# Altium PCB Power.PcbDoc (part 1 of 2)
Units mm, origin at the board's own origin, x right, y up, seen from the top; angles counter-clockwise.
Board outline 25.5 x 25.5 mm, 6 copper layers (1 Top (Sig/Pwr), 2 (GND), 3 (Sig/Pwr), 4 (GND/Sig), 5 (GND), 6 Bottom (Sig/Pwr)), stack 1.74 mm thick; 75 components, 42 nets, 252 pads, 4 vias.
Unrouted connection lines stored in the file: 215.
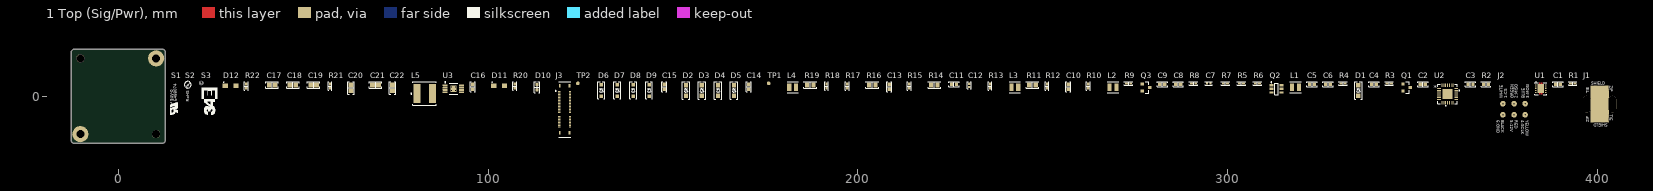
[diagram p0: 1 Top (Sig/Pwr) view]
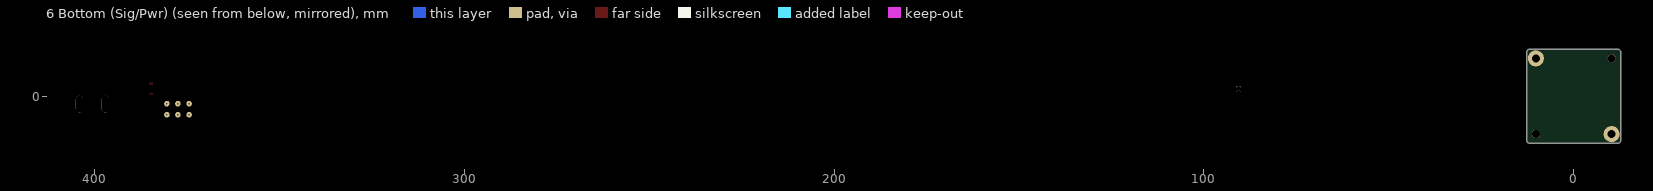
[diagram p1: 6 Bottom (Sig/Pwr) view, seen from below]
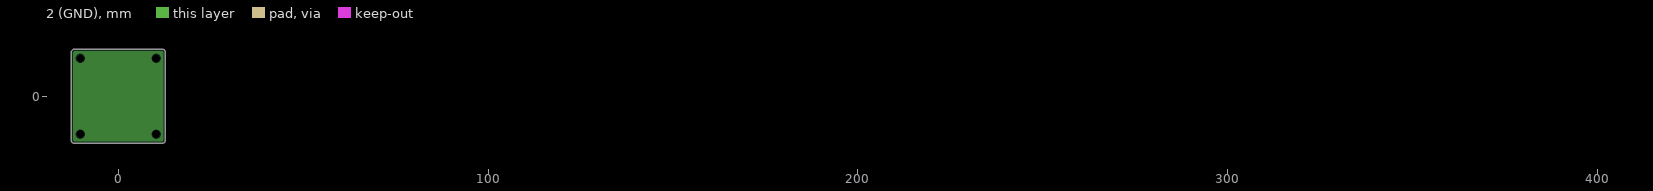
[diagram p2: 2 (GND), clearances drawn from the general rule]
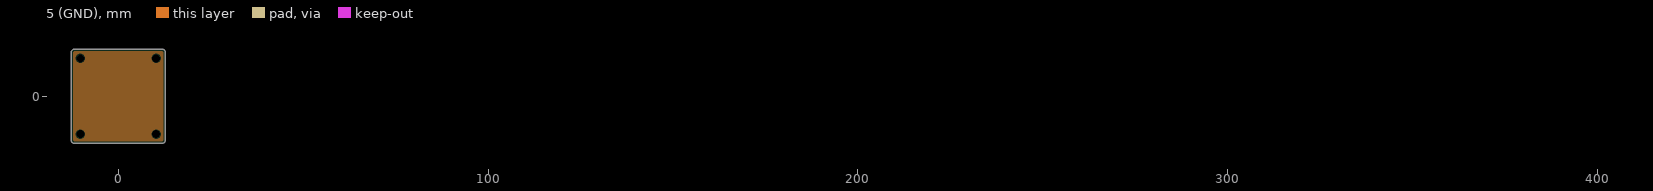
[diagram p3: 5 (GND), clearances drawn from the general rule]

## Layer stack, top to bottom
Top Solder: solder mask 0.0254, SM-001, Dk 4
1 Top (Sig/Pwr): signal copper 0.035
Dielectric 1: prepreg 0.11, PP-015, Dk 4.29
2 (GND): plane copper 0.035, net GND
Dielectric 2: core 0.6, Core-038, Dk 4.6
3 (Sig/Pwr): signal copper 0.035
Dielectric 3: prepreg 0.11, PP-015, Dk 4.29
4 (GND/Sig): signal copper 0.035
Dielectric 4: core 0.6, Core-038, Dk 4.6
5 (GND): plane copper 0.035, net GND
Dielectric 5: prepreg 0.11, PP-015, Dk 4.29
6 Bottom (Sig/Pwr): signal copper 0.035
Bottom Solder: solder mask 0.0254, SM-001, Dk 4

## Board outline
11.75,-12.75 11.973,-12.725 12.184,-12.651 12.373,-12.532 12.532,-12.373 12.651,-12.184 12.725,-11.973 12.75,-11.75 12.75,11.75 12.725,11.973 12.651,12.184 12.532,12.373 12.373,12.532 12.184,12.651 11.973,12.725 11.75,12.75 -11.75,12.75 -11.973,12.725 -12.184,12.651 -12.373,12.532 -12.532,12.373 -12.651,12.184 -12.725,11.973 -12.75,11.75 -12.75,-11.75 -12.725,-11.973 -12.651,-12.184 -12.532,-12.373 -12.373,-12.532 -12.184,-12.651 -11.973,-12.725 -11.75,-12.75

## Design rules (kind name [scope] priority, off if disabled: settings)
BoardOutlineClearance [IsPolygon] p1: gap=0.025 ignorepadtopadclearanceinfootprint=FALSE
Clearance [All] p1: gap=0.152 ignorepadtopadclearanceinfootprint=TRUE except(0.254: SMDPad-SMDPad)
DiffPairsRouting DiffPairsRouting_USB [InDifferentialPair('USB')] p1: maxlimit=0.254 minlimit=0.127 mostfreqgap=0.167 toplayer_mingap=0.254 toplayer_minwidth=0.176 toplayer_maxwidth=0.176 toplayer_prefwidth=0.152 bottomlayer_mingap=0.254 bottomlayer_minwidth=0.176 bottomlayer_maxwidth=0.176 bottomlayer_prefwidth=0.152 impedanceprofiledriven=TRUE impedanceprofileid={CBCFBFA0-D2E2-4D45-9055-C7C9E9EC4FAF} impedanceprofilevalue=90.000000 maxuncoupledlength=12.7
HoleSize [All] p1: absolutevalues=TRUE maxlimit=254 minlimit=0.3 maxpercent=80.000 minpercent=20.000
HoleToHoleClearance HoleToHoleClearance_Via [isVia] p1: gap=0.279 allowstackedmicrovias=TRUE
HoleToHoleClearance [Not isVia] p2: gap=0.406 allowstackedmicrovias=TRUE
MinimumSolderMaskSliver [All] p1: minsoldermaskwidth=0.102
PlaneClearance [All] p1: clearance=0.203
PlaneConnect [All] p1: planeconnectstyle=Direct reliefexpansion=0.508 reliefentries=4 reliefconductorwidth=0.254 reliefairgap=0.254
PolygonConnect PolygonConnect_ThruPin [IsThruPin] p1: thpad.connectstyle=Relief thpad.reliefconductorwidth=0.508 thpad.reliefentries=4 thpad.polygonreliefangle="45 Angle" thpad.airgapwidth=0.254 smdpad.connectstyle=Direct smdpad.reliefconductorwidth=0.254 smdpad.reliefentries=4 smdpad.polygonreliefangle="90 Angle" smdpad.airgapwidth=0.254 via.connectstyle=Relief via.reliefconductorwidth=0.254 via.reliefentries=4 via.polygonreliefangle="90 Angle" via.airgapwidth=0.254
PolygonConnect [All] p2: connectstyle=Direct reliefconductorwidth=0.254 reliefentries=4 polygonreliefangle="90 Angle" airgapwidth=0.254
RoutingVias [All] p1: holewidth=0.3 width=0.5 viastyle="Through Hole" minholewidth=0.3 minwidth=0.5 maxholewidth=0.3 maxwidth=0.5
SilkToSilkClearance [All] p1: silktosilkclearance=0
SilkToSolderMaskClearance [IsPad] p1: minsilkscreentomaskgap=0.152 clearancetoexposedcopper=TRUE
SolderMaskExpansion SolderMaskExpansion_Via [IsVia] p1: expansion=0.102 istentingtop=TRUE
SolderMaskExpansion [Not IsVia] p2: expansion=0.051 istentingtop=FALSE
Width [All] p1: maxlimit=2.032 minlimit=0.152 preferedwidth=0.254 minimp=50.000000 maximp=50.000000 favimp=50.000000
22 further rules are at their usual default settings.

## Components (designator, comment, footprint, x,y, rotation, side; value= is the part's Value field where it differs from the comment)
C1 "1 µF" "CAP 0603_1608" 389.357,3.277 r0 top
C2 "2.2µF" "CAP 0603_1608" 352.831,3.277 r0 top
C3 "22µF" "CAP 0603_1608" 365.709,3.277 r0 top
C4 "1 µF" "CAP 0603_1608" 339.623,3.277 r0 top
C5 "22µF" "CAP 0603_1608" 322.859,3.277 r0 top
C6 "22µF" "CAP 0603_1608" 327.177,3.277 r0 top
C7 "120pF" "CAP 0402_1005" 294.919,3.48 r0 top
C8 "2.2µF" "CAP 0603_1608" 286.69,3.277 r0 top
C9 "22µF" "CAP 0603_1608" 282.372,3.277 r0 top
C10 "2.2µF" "CAP 0603_1608" 256.921,2.565 r90 top
C11 "22µF" "CAP 0603_1608" 226.009,3.277 r0 top
C12 "15 pF" "CAP 0402_1005" 230.175,2.972 r90 top
C13 "2.2µF" "CAP 0603_1608" 208.509,2.565 r90 top
C14 "22µF" "CAP 0603_1608" 170.536,2.565 r90 top
C15 "2.2µF" "CAP 0603_1608" 147.625,2.565 r90 top
C16 "0.1µF" "CAP 0603_1608" 95.885,2.565 r90 top
C17 "10µF" "CAP 0805_2012" 41.631,3.073 r0 top
C18 "10µF" "CAP 0805_2012" 47.219,3.073 r0 top
C19 "10µF" "CAP 0805_2012" 52.832,3.073 r0 top
C20 "22 µF" "CAP 0805_2012" 62.967,2.286 r90 top
C21 "22 µF" "CAP 0805_2012" 69.596,3.073 r0 top
C22 "22 µF" "CAP 0805_2012" 74.143,2.286 r90 top
D1 "ATV02W360B-HF" SOD123F 335.407,1.575 r90 top
D2 "ATV02W360B-HF" SOD123F 153.543,1.575 r90 top
D3 "ATV02W360B-HF" SOD123F 157.861,1.575 r90 top
D4 "ATV02W360B-HF" SOD123F 162.204,1.575 r90 top
D5 "ATV02W360B-HF" SOD123F 166.522,1.575 r90 top
D6 "MMSZ5226BT1G" SOD-123 130.607,1.575 r90 top
D7 "MMSZ5226BT1G" SOD-123 134.925,1.575 r90 top
D8 "MMSZ5226BT1G" SOD-123 139.243,1.575 r90 top
D9 "MMSZ5226BT1G" SOD-123 143.561,1.575 r90 top
D10 "Red" "LED 0603_1608 RED" 113.233,2.464 r90 top
D11 "SS26FL" SS26FL 103.022,2.87 r0 top
D12 "SS26FL" SS26FL 30.404,2.87 r0 top
J1 "30-00672-SHLD" 30-00672-SHLD 400.634,-2.108 r90 top
J2 "30-00672-THT" 30-00672-THT 377.495,-3.505 r0 top
J3 "2049280501" 2049280501 120.726,-3.531 r0 top
L1 "1.5uH" FP-DFE252012C-IPC_C 318.389,2.464 r0 top
L2 "1.5uH" FP-DFE252012C-IPC_C 269.037,2.464 r0 top
L3 "1.5uH" FP-DFE252012C-IPC_C 242.494,2.464 r0 top
L4 "1.5uH" FP-DFE252012C-IPC_C 182.397,2.464 r0 top
L5 "10uH" FP-VLS6045EX-100M-MFG 82.855,0.711 r0 top
Q1 "ZXM61N03FTA" FP-SOT23-MFG 348.437,2.362 r0 top
Q2 "DMP3056LDM-7" SOT95P285X130-6N 313.258,2.007 r0 top
Q3 "ZXM61N03FTA" FP-SOT23-MFG 277.978,2.362 r0 top
R1 "0" "RES 0402_1005" 393.37,3.454 r0 top value="0 Ohms"
R2 "47k" "RES 0603_1608" 369.926,3.277 r0 top value="47 kOhms"
R3 "9.31k 1%" "RES 0402_1005" 343.738,3.454 r0 top value="9.31 kOhms"
R4 "10k" "RES 0402_1005" 331.292,3.454 r0 top value="10 kOhms"
R5 "100k 1%" "RES 0402_1005" 303.759,3.454 r0 top value="100 kOhms"
R6 "0" "RES 0402_1005" 308.077,3.454 r0 top value="0 Ohms"
R7 "120k 1%" "RES 0402_1005" 299.441,3.454 r0 top value="120 kOhms"
R8 "10k" "RES 0402_1005" 290.805,3.454 r0 top value="10 kOhms"
R9 "10k" "RES 0402_1005" 273.279,3.454 r0 top value="10 kOhms"
R10 "0" "RES 0402_1005" 262.331,2.769 r90 top value="0 Ohms"
R11 "100" "RES 0805_2012" 247.244,3.073 r0 top value="100 Ohms"
R12 "10k" "RES 0402_1005" 251.155,2.769 r90 top value="10 kOhms"
R13 "88.7k 1%" "RES 0402_1005" 235.788,2.769 r90 top value="88.7 kOhms"
R14 "100" "RES 0805_2012" 220.701,3.073 r0 top value="100 Ohms"
R15 "0" "RES 0402_1005" 213.919,2.769 r90 top value="0 Ohms"
R16 "100" "RES 0805_2012" 203.911,3.073 r0 top value="100 Ohms"
R17 "59k 1%" "RES 0402_1005" 197.155,2.769 r90 top value="59 kOhms"
R18 "10k" "RES 0402_1005" 191.567,2.769 r90 top value="10 kOhms"
R19 "100" "RES 0805_2012" 187.147,3.073 r0 top value="100 Ohms"
R20 "1k" "RES 0402_1005" 107.213,2.769 r90 top
R21 "5.1k 1%" "RES 0402_1005" 57.252,2.769 r90 top value="5.1 kOhms"
R22 "953 1%" "RES 0402_1005" 34.62,2.769 r90 top value="953 Ohms"
S1 "" UL 14.986,-1.448 r90 top
S2 "" RoHS 18.796,1.168 r90 top
S3 "" 34EngineeringLogo 27.153,-5.359 r90 top
TP1 "" TestPoint1mm 175.895,3.505 r90 top
TP2 "" TestPoint1mm 124.282,3.505 r90 top
U1 "TCKE812NL,RF" WSON10B_TOS 384.708,2.057 r0 top
U2 "MAX20029ATIF/V+" MAX20029ATIF/V+ 359.512,0.61 r0 top
U3 "LM2738XMY/NOPB" DGN0008A_N 90.653,2.032 r0 top

## Footprints (in the part's own frame and the unit in brackets; to place one, negate y for a bottom-side part, rotate by r counter-clockwise, add the part's x,y. Pads: shape width x height; smd on the part's side, far side on the other; paste and mask are expansions set on the pad)
30-00672-SHLD [mm]
  oval 4.5x2 hole 2 slot 4.5 at 0 deg unplated: MNT(0,3.5) MNT(0,-3.5)
  rect 10x5 smd: MNT(0,0)
30-00672-THT [mm]
  round 1.5 hole 0.35: 1(-3,1.5) 2(0,1.5) 3(3,1.5) 4(3,-1.5) 5(0,-1.5) 6(-3,-1.5)
34EngineeringLogo [mm]
  silkscreen extent 0.33,0.32 7.61,4.55
2049280501 [mm]
  rect 0.63x0.25 smd paste+0 mask+0: 1(-1.435,4.8) 2(-1.435,4.4) 3(-1.435,4) 4(-1.435,3.6) 5(-1.435,3.2) 6(-1.435,2.8) 7(-1.435,2.4) 8(-1.435,2) 9(-1.435,1.6) 10(-1.435,1.2) 11(-1.435,0.8) 12(-1.435,0.4) 13(-1.435,0) 14(-1.435,-0.4) 15(-1.435,-0.8) 16(-1.435,-1.2) 17(-1.435,-1.6) 18(-1.435,-2) 19(-1.435,-2.4) 20(-1.435,-2.8) 21(-1.435,-3.2) 22(-1.435,-3.6) 23(-1.435,-4) 24(-1.435,-4.4) 25(-1.435,-4.8) 26(1.435,-4.8) 27(1.435,-4.4) 28(1.435,-4) 29(1.435,-3.6) 30(1.435,-3.2) 31(1.435,-2.8) 32(1.435,-2.4) 33(1.435,-2) 34(1.435,-1.6) 35(1.435,-1.2) 36(1.435,-0.8) 37(1.435,-0.4) 38(1.435,0) 39(1.435,0.4) 40(1.435,0.8) 41(1.435,1.2) 42(1.435,1.6) 43(1.435,2) 44(1.435,2.4) 45(1.435,2.8) 46(1.435,3.2) 47(1.435,3.6) 48(1.435,4) 49(1.435,4.4) 50(1.435,4.8)
  rect 0.5x1 smd paste+0 mask+0: MNT(-1.34,-6.36) MNT(-1.34,6.36) MNT(1.34,-6.36) MNT(1.34,6.36)
  silkscreen extent -2.55,-7.5 1.6,7.5, body extent -1.6,-7.5 1.6,7.5, height 2.37
"CAP 0402_1005" [mm] "Chip Capacitor, 2-Leads, Body 1.02x0.51mm, IPC Medium Density"
  rect 0.6x0.64 smd: 1(-0.44,0) 2(0.44,0)
  silkscreen extent -1,-0.5 1,0.5, body extent -0.5,-0.26 0.5,0.26, height 0.52
"CAP 0603_1608" [mm] "Chip Capacitor, 2-Leads, Body 1.60x0.80mm, IPC Medium Density"
  rect 0.9x1 smd: 1(-0.675,0) 2(0.675,0)
  silkscreen extent -1.4,-0.7 1.4,0.7, body extent -0.8,-0.41 0.8,0.41, height 0.82
"CAP 0805_2012" [mm] "Chip Capacitor, 2-Leads, Body 2.00x1.20mm, IPC Medium Density"
  rect 1.3x1.4 smd: 1(-0.8,0) 2(0.8,0)
  silkscreen extent -1.7,-0.9 1.7,0.9, body extent -1,-0.64 1,0.64, height 1.26
DGN0008A_N [mm] "TSOP, 8-Leads, Body 3.1x3.1mm, Pitch 0.65mm, Thermal Pad 1.85x1.73mm, IPC Medium Density"
  rrect22% 1.35x0.45 smd: 1(-2.225,0.975) 2(-2.225,0.325) 3(-2.225,-0.325) 4(-2.225,-0.975) 5(2.225,-0.975) 6(2.225,-0.325) 7(2.225,0.325) 8(2.225,0.975)
  rrect6% 1.73x1.85 smd: 9(0,0)
  silkscreen extent -2.35,-1.55 1.15,1.9, body extent -2.45,-1.5 2.45,1.5, height 0.94
FP-DFE252012C-IPC_C [mm]
  rect 1.155x2.106 smd paste+0 mask+0: 1(-0.926,0) 2(0.926,0)
  silkscreen extent -1.5,-1.5 1.5,1.5, body extent -1.6,-1.2 1.6,1.2, height 0.25
FP-SOT23-MFG [mm]
  rect 0.9x0.8 smd paste+0 mask+0: 1(-1,0.95) 2(-1,-0.95) 3(1,0)
  silkscreen extent -0.18,-1.5 0.7,1.5, body extent -1.55,-1.6 1.55,1.6, height 0.25
FP-VLS6045EX-100M-MFG [mm]
  rect 1.9x5.1 smd paste+0 mask+0: 1(-2.1,0) 2(2.1,0)
  silkscreen extent -3.72,-3.15 3.15,3.15, body extent -3.25,-3.25 3.25,3.25, height 0.25
"LED 0603_1608 RED" [mm] "Chip Diode, 2-Leads, Body 1.60x0.80mm, IPC Medium Density"
  rect 0.8x0.8 smd: 1(-0.75,0) 2(0.75,0)
  silkscreen extent -1.52,-0.7 1.52,0.7, body extent -0.8,-0.4 0.8,0.4, height 0.53
MAX20029ATIF/V+ [mil]
  rect 38x10 smd paste+0 mask+0: 1(-91.5,59.06) 2(-91.5,39.37) 3(-91.5,19.68) 4(-91.5,0) 5(-91.5,-19.68) 6(-91.5,-39.37) 7(-91.5,-59.06) 15(91.5,-59.06) 16(91.5,-39.37) 17(91.5,-19.68) 18(91.5,0) 19(91.5,19.68) 20(91.5,39.37) 21(91.5,59.06)
  rect 10x38 smd paste+0 mask+0: 8(-59.06,-91.5) 9(-39.37,-91.5) 10(-19.69,-91.5) 11(0,-91.5) 12(19.69,-91.5) 13(39.37,-91.5) 14(59.06,-91.5) 22(59.06,91.5) 23(39.37,91.5) 24(19.69,91.5) 25(0,91.5) 26(-19.69,91.5) 27(-39.37,91.5) 28(-59.06,91.5)
  rect 110x110 smd paste-54.5 mask+0: 29(0,0)
  silkscreen extent -104,-130 130,104, body extent -99,-99 99,99, height 32
"RES 0402_1005" [mm] "Chip Resistor, 2-Leads, Body 1.0x0.5mm, IPC Medium Density"
  rect 0.75x0.6 smd: 1(-0.575,0) 2(0.575,0)
  silkscreen extent -1.14,-0.51 1.14,0.51, body extent -0.5,-0.25 0.5,0.25, height 0.35
"RES 0603_1608" [mm] "Chip Resistor, 2-Leads, Body 1.60x0.80mm, IPC Medium Density"
  rect 0.85x0.95 smd: 1(-0.65,0) 2(0.65,0)
  silkscreen extent -1.27,-0.7 1.27,0.7, body extent -0.8,-0.4 0.8,0.4, height 0.45
"RES 0805_2012" [mm] "Chip Resistor, 2-Leads, Body 2.00x1.25mm, IPC Medium Density"
  rect 1.15x1.35 smd: 1(-0.875,0) 2(0.875,0)
  silkscreen extent -1.7,-0.9 1.7,0.9, body extent -1,-0.62 1,0.63, height 0.6
RoHS [mm]
  silkscreen extent 1.05,-0.9 2.85,0.9
SOD123F [mm] "SODFL, 2-Leads, Body 1.60x3.50mm, IPC Medium Density"
  rect 1.2x1.2 smd: 1(-1.43,0) 2(1.43,0)
  silkscreen extent -2.41,-1.02 2.41,1.02, body extent -1.75,-0.8 1.75,0.8, height 1.1
SOD-123 [mm] "SOD, 2-Leads, Body 1.55x3.70mm, IPC Medium Density"
  rect 0.9x0.95 smd: 1(-1.575,0) 2(1.575,0)
  silkscreen extent -2.3,-0.92 2.41,0.92, body extent -1.86,-0.78 1.86,0.77, height 1.35
SOT95P285X130-6N [mm] "SOT23, 6-Leads, Body 3.00x2.85mm, Pitch 0.95mm, IPC Medium Density"
  rect 1.05x0.6 smd: 1(-1.375,0.95) 2(-1.375,0) 3(-1.375,-0.95) 4(1.375,-0.95) 5(1.375,0) 6(1.375,0.95)
  silkscreen extent -1.5,-1.55 0.45,1.92, body extent -1.5,-1.55 1.5,1.55, height 1.3
SS26FL [mm] "SODFL, 2-Leads, Body 1.73x3.60mm, IPC Medium Density"
  rect 1.4x1.15 smd: 1(-1.45,0) 2(1.45,0)
  silkscreen extent -1.96,0.88 -1.85,1, body extent -1.8,-0.97 1.8,0.97, height 1.08
TestPoint1mm [mm]
  round 1 smd: 1(0,0)
UL [mm]
  silkscreen extent -3.57,-1.1 -0.22,0.93
WSON10B_TOS [mm]
  rect 0.4x0.279 smd paste+0 mask+0: 1(-1.3,1) 2(-1.3,0.5) 3(-1.3,0) 4(-1.3,-0.5) 5(-1.3,-1) 6(1.3,-1) 7(1.3,-0.5) 8(1.3,0) 9(1.3,0.5) 10(1.3,1)
  rect 1.65x2.4 smd paste+0 mask+0: 11(0,0)
  1 Top (Sig/Pwr) region: -0.14,1.194 -0.368,1.194 -0.368,1.537 -0.14,1.537
  1 Top (Sig/Pwr) region: 0.14,1.194 0.368,1.194 0.368,1.537 0.14,1.537
  1 Top (Sig/Pwr) region: -0.14,-1.194 -0.368,-1.194 -0.368,-1.537 -0.14,-1.537
  1 Top (Sig/Pwr) region: 0.14,-1.194 0.368,-1.194 0.368,-1.537 0.14,-1.537
  silkscreen extent -1.63,-1.63 1.63,1.85, body extent -1.5,-1.54 1.5,1.54, height 0.71

## Part data
C1 C4: library part TMK107BJ105MAHT, "CAP CER 1UF 25V X5R 0603", Device Package="0603 (1608 Metric)", Manufacturer="Taiyo Yuden", Operating Temperature="-55°C ~ 85°C", Ratings=AEC-Q200, Supplier Part Number 1=587-6356-1-ND, Temperature Coefficient=X5R, Tolerance=±20%, Voltage - Rated=25V, Applications="Automotive, SMPS Filtering", Capacitance="1 µF", ComponentLink1Description=Datasheet, ComponentLink1URL="https://ds.yuden.co.jp/TYCOMPAS/ut/detail?pn=TMK107BJ105MAHT &u=M", ComponentLink2Description="DigiKey Link", ComponentLink2URL=https://www.digikey.com/en/products/detail/taiyo-yuden/TMK107BJ105MAHT/6563148, Features="Ultra Low ESR", lastupdated="7/10/2022 9:03:06 AM", Lifecycle Status=Active, Minimum Order=1, Mounting Type="Surface Mount, MLCC", Package / Case="0603 (1608 Metric)", Packaging=TapeAndReel, Part Number=TMK107BJ105MAHT, Part Status=Active, partid=2797, price=0.02, Series=M, Size / Dimension="0.063\" L x 0.031\" W (1.60mm x 0.80mm)", Supplier 1=DigiKey, Thickness (Max)="0.035\" (0.90mm)"
C2 C8 C10 C13 C15: library part 0603ZD225MAT2A, "CAP CER 2.2UF 10V X5R 0603", Device Package="0603 (1608 Metric)", Manufacturer="AVX Corporation", Operating Temperature="-55°C ~ 85°C", Supplier Part Number 1=478-7941-1-ND, Temperature Coefficient=X5R, Tolerance=±20%, Voltage - Rated=10V, Applications="General Purpose", Capacitance=2.2µF, ComponentLink1Description=Datasheet, ComponentLink1URL=http://datasheets.avx.com/cx5r.pdf, ComponentLink2Description="DigiKey Link", ComponentLink2URL=http://digikey.com/product-detail/en/avx-corporation/0603ZD225MAT2A/478-7941-1-ND/3881564, lastupdated="9/2/2020 1:03:07 AM", Lifecycle Status=Active, Minimum Order=1, Mounting Type="Surface Mount, MLCC", Package / Case="0603 (1608 Metric)", Packaging=TapeAndReel, Part Number=0603ZD225MAT2A, Part Status=Active, partid=16270, price=0.04, Series=-, Size / Dimension="0.063\" L x 0.032\" W (1.60mm x 0.81mm)", Supplier 1=DigiKey, Thickness (Max)="0.035\" (0.90mm)"
C3 C5 C6 C9 C11 C14: library part 06036D226MAT2A, "CAP CER 22UF 6.3V X5R 0603", Device Package="0603 (1608 Metric)", Manufacturer="AVX Corporation", Operating Temperature="-55°C ~ 85°C", Supplier Part Number 1=478-10812-1-ND, Temperature Coefficient=X5R, Tolerance=±20%, Voltage - Rated=6.3V, Applications="General Purpose", Capacitance=22µF, ComponentLink1Description=Datasheet, ComponentLink1URL=http://datasheets.avx.com/cx5r.pdf, ComponentLink2Description="DigiKey Link", ComponentLink2URL=http://digikey.com/product-detail/en/avx-corporation/06036D226MAT2A/478-10812-1-ND/7536349, lastupdated="9/2/2020 1:03:16 AM", Lifecycle Status=Active, Minimum Order=1, Mounting Type="Surface Mount, MLCC", Package / Case="0603 (1608 Metric)", Packaging=TapeAndReel, Part Number=06036D226MAT2A, Part Status=Active, partid=13180, price=0.10, Series=-, Size / Dimension="0.063\" L x 0.032\" W (1.60mm x 0.81mm)", Supplier 1=DigiKey, Thickness (Max)="0.040\" (1.02mm)"
C7: library part 04023A121JAT2A, "CAP CER 120PF 25V NP0 0402", Device Package="0402 (1005 Metric)", Manufacturer="AVX Corporation", Operating Temperature="-55°C ~ 125°C", Supplier Part Number 1=478-11356-1-ND, Temperature Coefficient="C0G, NP0", Tolerance=±5%, Voltage - Rated=25V, Applications="General Purpose", Capacitance=120pF, ComponentLink1Description=Datasheet, ComponentLink1URL=http://datasheets.avx.com/C0GNP0-Dielectric.pdf, ComponentLink2Description="DigiKey Link", ComponentLink2URL=http://digikey.com/product-detail/en/avx-corporation/04023A121JAT2A/478-11356-1-ND/8019109, lastupdated="2/8/2022 12:26:51 PM", Lifecycle Status=Active, Minimum Order=1, Mounting Type="Surface Mount, MLCC", Package / Case="0402 (1005 Metric)", Packaging=TapeAndReel, Part Number=04023A121JAT2A, Part Status=Active, partid=6216, price=0.01, Series=-, Size / Dimension="0.039\" L x 0.020\" W (1.00mm x 0.50mm)", Supplier 1=DigiKey, Thickness (Max)="0.022\" (0.56mm)"
C12: library part 885012005008, "CAP CER 15PF 10V C0G/NP0 0402", Device Package="0402 (1005 Metric)", Manufacturer="Würth Elektronik", Operating Temperature="-55°C ~ 125°C", Supplier Part Number 1=732-7426-1-ND, Temperature Coefficient="C0G, NP0", Tolerance=±5%, Voltage - Rated=10V, Applications="General Purpose", Capacitance="15 pF", ComponentLink1Description=Datasheet, ComponentLink1URL=https://katalog.we-online.de/pbs/datasheet/885012005008.pdf, ComponentLink2Description="DigiKey Link", ComponentLink2URL=https://www.digikey.com/en/products/detail/würth-elektronik/885012005008/5453281, lastupdated="7/10/2022 8:59:25 AM", Lifecycle Status=Active, Minimum Order=1, Mounting Type="Surface Mount, MLCC", Package / Case="0402 (1005 Metric)", Packaging=TapeAndReel, Part Number=885012005008, Part Status=Active, partid=7101, price=0.01, Series=WCAP-CSGP, Size / Dimension="0.039\" L x 0.020\" W (1.00mm x 0.50mm)", Supplier 1=DigiKey, Thickness (Max)="0.022\" (0.55mm)"
C16: library part 06033C104K4T4A, "CAP CER 0.1UF 25V X7R 0603", Device Package="0603 (1608 Metric)", Manufacturer="AVX Corporation", Operating Temperature="-55°C ~ 125°C", Ratings=AEC-Q200, Supplier Part Number 1=478-10673-1-ND, Temperature Coefficient=X7R, Tolerance=±10%, Voltage - Rated=25V, Applications=Automotive, Capacitance=0.1µF, ComponentLink1Description=Datasheet, ComponentLink1URL=http://datasheets.avx.com/AutoMLCC.pdf, ComponentLink2Description="DigiKey Link", ComponentLink2URL=http://digikey.com/product-detail/en/avx-corporation/06033C104K4T4A/478-10673-1-ND/7536544, lastupdated="9/2/2020 1:03:35 AM", Lifecycle Status=Active, Minimum Order=1, Mounting Type="Surface Mount, MLCC", Package / Case="0603 (1608 Metric)", Packaging=TapeAndReel, Part Number=06033C104K4T4A, Part Status=Active, partid=2749, price=0.02, Series=-, Size / Dimension="0.063\" L x 0.032\" W (1.60mm x 0.81mm)", Supplier 1=DigiKey, Thickness (Max)="0.035\" (0.90mm)"
C17 C18 C19: library part 08053D106KAT2A, "CAP CER 10UF 25V X5R 0805", Device Package="0805 (2012 Metric)", Manufacturer="AVX Corporation", Operating Temperature="-55°C ~ 85°C", Supplier Part Number 1=478-7436-1-ND, Temperature Coefficient=X5R, Tolerance=±10%, Voltage - Rated=25V, Applications="General Purpose", Capacitance=10µF, ComponentLink1Description=Datasheet, ComponentLink1URL=http://datasheets.avx.com/cx5r.pdf, ComponentLink2Description="DigiKey Link", ComponentLink2URL=http://digikey.com/product-detail/en/avx-corporation/08053D106KAT2A/478-7436-1-ND/3660337, lastupdated="9/2/2020 1:04:14 AM", Lifecycle Status=Active, Minimum Order=1, Mounting Type="Surface Mount, MLCC", Package / Case="0805 (2012 Metric)", Packaging=TapeAndReel, Part Number=08053D106KAT2A, Part Status=Active, partid=15850, price=0.13, Series=-, Size / Dimension="0.079\" L x 0.049\" W (2.00mm x 1.25mm)", Supplier 1=DigiKey, Thickness (Max)="0.051\" (1.30mm)"
C20 C21 C22: library part TMK212BBJ226MG-TT, "CAP CER 22UF 25V X5R 0805", Device Package="0805 (2012 Metric)", Manufacturer="Taiyo Yuden", Operating Temperature="-55°C ~ 85°C", Supplier Part Number 1=587-6359-1-ND, Temperature Coefficient=X5R, Tolerance=±20%, Voltage - Rated=25V, Applications="SMPS Filtering", Capacitance="22 µF", ComponentLink1Description=Datasheet, ComponentLink1URL="https://ds.yuden.co.jp/TYCOMPAS/ut/detail?pn=TMK212BBJ226MG-TT &u=M", ComponentLink2Description="DigiKey Link", ComponentLink2URL=https://www.digikey.com/en/products/detail/taiyo-yuden/TMK212BBJ226MG-TT/7403956, lastupdated="7/10/2022 9:05:54 AM", Lifecycle Status=Active, Minimum Order=1, Mounting Type="Surface Mount, MLCC", Package / Case="0805 (2012 Metric)", Packaging=TapeAndReel, Part Number=TMK212BBJ226MG-TT, Part Status=Active, partid=8285, price=0.21, Series=M, Size / Dimension="0.079\" L x 0.049\" W (2.00mm x 1.25mm)", Supplier 1=DigiKey, Thickness (Max)="0.057\" (1.45mm)"
D1 D2 D3 D4 D5: "TVS DIODE 36VWM 58.1VC SOD123", Current - Peak Pulse (10/1000µs)=3.44A, Manufacturer="Comchip Technology", Operating Temperature="-55°C ~ 150°C (TJ)", Package / Case=SOD-123F, Power - Peak Pulse=200W, Power Line Protection=No, Supplier Part Number 1=641-1664-1-ND, Voltage - Breakdown (Min)=40V, Voltage - Clamping (Max) @ Ipp=58.1V, Voltage - Reverse Standoff (Typ)=36V, Applications=Automotive, Bidirectional Channels=1, ComponentLink1Description=Datasheet, ComponentLink1URL=http://www.comchiptech.com/admin/files/product/ATV02W-HF%20series%20RevC.pdf, ComponentLink2Description="DigiKey Link", ComponentLink2URL=https://www.digikey.com/en/products/detail/comchip-technology/ATV02W360B-HF/5013738, lastupdated="7/10/2022 10:02:24 AM", Lifecycle Status=Active, Minimum Order=1, Mounting Type="Surface Mount", Packaging=TapeAndReel, Part Number=ATV02W360B-HF, Part Status=Active, partid=10262, price=0.09, Series="Automotive, AEC-Q101", Supplier 1=DigiKey, Supplier Device Package=SOD-123F, Type=Zener
D6 D7 D8 D9: "DIODE ZENER 3.3V 500MW SOD123", Current - Reverse Leakage @ Vr="25µA @ 1V", Manufacturer="ON Semiconductor", Operating Temperature="-55°C ~ 150°C", Package / Case=SOD-123, Power - Max=500mW, Supplier Part Number 1=MMSZ5226BT1GOSCT-ND, Tolerance=±5%, Voltage - Forward (Vf) (Max) @ If="900mV @ 10mA", Voltage - Zener (Nom) (Vz)=3.3V, ComponentLink1Description=Datasheet, ComponentLink1URL=http://www.onsemi.com/pub/Collateral/MMSZ5221BT1-D.PDF, ComponentLink2Description="DigiKey Link", ComponentLink2URL=http://digikey.com/product-detail/en/on-semiconductor/MMSZ5226BT1G/MMSZ5226BT1GOSCT-ND/1139888, Impedance (Max) (Zzt)="28 Ohms", lastupdated="7/10/2022 9:46:18 AM", Lifecycle Status=Active, Minimum Order=1, Mounting Type="Surface Mount", Packaging=TapeAndReel, Part Number=MMSZ5226BT1G, Part Status=Active, partid=1977, price=0.04, Series=-, Supplier 1=DigiKey, Supplier Device Package=SOD-123
D10: library part SML-D12U1WT86, "LED RED DIFFUSED 1608 SMD", Current - Test=20mA, Device Package="0603 (1608 Metric)", Lens Color=White, Manufacturer="Rohm Semiconductor", Millicandela Rating=63mcd, Supplier Device Package="1608 (0603)", Supplier Part Number 1=SML-D12U1WT86CT-ND, Voltage - Forward (Vf) (Typ)=2.2V, Color=Red, ComponentLink1Description=Datasheet, ComponentLink1URL=https://www.rohm.com/datasheet/SML-D12U1W, ComponentLink2Description="DigiKey Link", ComponentLink2URL=https://www.digikey.com/en/products/detail/rohm-semiconductor/SML-D12U1WT86/5843853, Configuration=Standard, Height (Max)=0.65mm, lastupdated="7/10/2022 9:48:39 AM", Lens Size="1.20mm x 0.80mm", Lens Style="Rectangle with Flat Top", Lens Transparency=Diffused, Lifecycle Status=Active, Minimum Order=1, Mounting Type="Surface Mount", Package / Case="0603 (1608 Metric)", Packaging=TapeAndReel, Part Number=SML-D12U1WT86, Part Status=Active, partid=452, price=0.02, Series=SML-D12, Size / Dimension="1.60mm L x 0.80mm W", Supplier 1=DigiKey, Wavelength - Dominant=620nm
D11 D12: "Diode Schottky Barrier Rectifier 60V 2A 2-Pin SOD-123F T/R", Average Rectified Current=2A, Case/Package=SOD, Manufacturer="ON Semiconductor / Fairchild", Max Forward Surge Current (Ifsm)=50A, Max Repetitive Reverse Voltage (Vrrm)=60V, Category="Rectifier Diodes", ComponentLink1Description=http://www.farnell.com/datasheets/2552652.pdf?src-supplier=Farnell, ComponentLink1URL=http://www.farnell.com/datasheets/2552652.pdf?src-supplier=Farnell, ComponentLink2Description=https://www.fairchildsemi.com/datasheets/SS/SS24FL.pdf?src-supplier=Digi-Key, ComponentLink2URL=https://www.fairchildsemi.com/datasheets/SS/SS24FL.pdf?src-supplier=Digi-Key, ComponentLink3Description=http://www.farnell.com/datasheets/2552652.pdf?src-supplier=Element14, ComponentLink3URL=http://www.farnell.com/datasheets/2552652.pdf?src-supplier=Element14, ComponentLink4Description=http://www.farnell.com/datasheets/2552652.pdf?src-supplier=Newark, ComponentLink4URL=http://www.farnell.com/datasheets/2552652.pdf?src-supplier=Newark, Element Configuration=Single, Manufacturer Part Number=SS26FL, Max Reverse Voltage (DC)=60V, Mount="Surface Mount", Packaging="Tape and Reel", Pricing 1="3000=0.09160, 6000=0.09070, 9000=0.07910, 12000=0.07830, 15000=0.07750, 24000=0.07030 (USD)", Reverse Recovery Time=8.26ns, RoHS=Yes, RoHS Compliant=Yes, Stock 1=288000, Supplier 1="Arrow Electronics", Supplier Part Number 1=SS26FL, Weight=0.0276g
J1 J2: "Multi-Conductor Cable Braid Thermoplastic Elastomer 6Conductors 28AWG 4.9mm 300V Black", Color=Black, Manufacturer=Tensility, Manufacturer Part Number=30-00672, Max Operating Temperature=80°C, Min Operating Temperature=-40°C, Supplier Part Number 1=T1388-5-ND, Voltage=300V, ComponentLink1Description=http://www.tensility.com/pdffiles/30-00672.pdf?src-supplier=Digi-Key, ComponentLink1URL=http://www.tensility.com/pdffiles/30-00672.pdf?src-supplier=Digi-Key, Conductor Material=Copper, Insulation Material=Polyurethane, Number of Conductors=6, Pricing 1="1=23.49000, 5=19.22200, 10=14.95100 (USD)", RoHS=No, Stock 1=6, Supplier 1=Digi-Key, Wire/Cable Gauge=28AWG, Wire/Cable Type=Multi-Conductor
J3: "SlimStack Board-to-Board Plug, 0.40mm Pitch, FSB3 Floating Series, 3.00mm Mated Height, 3.20 Mated Width, 50 Circuits", Manufacturer=Molex, Manufacturer Part Number=203955-0503, Supplier Part Number 1=538-204928-0501, Pricing 1="1=4.46000, 10=3.93000, 50=3.93000, 100=3.13000, 500=3.04000, 1000=2.59000, 3000=2.41000, 6000=2.32000, 9000=2.23000, 10000=2.41000 (USD)", RoHS=No, Stock 1=8554, Supplier 1=Mouser
L1 L2 L3 L4: library part CMP-06042-006881-1, "Shielded Wirewound Inductor 1.5uH 20% 2600mA 0.06Ω 1008 (2520)", Case Code (Imperial)=1008, Case Code (Metric)=2520, Current Rating=3.5A, DC Resistance (DCR)=60mR, Max DC Current=2.6A, Max Operating Temperature=125°C, Min Operating Temperature=-40°C, Resistor Type=Wirewound, Test Frequency=1MHz, Tolerance=20%, Case/Package=1008, Core Material=Ferrite, Depth=2mm, Height - Seated (Max)=0.039inch, Inductance=1.5uH, Length=0.098inch, Mount="Surface Mount", Packaging="Tape and Reel", Shielding=Shielded, Width=0.079inch
L5: library part CMP-08253-000184-1, "FIXED IND 10UH 3.4A 61 MOHM SMD", Case/Package=Nonstandard, Current Rating=3.4A, DC Resistance (DCR)=61mR, Inductance Tolerance=20%, Max Operating Temperature=105°C, Min Operating Temperature=-40°C, Resistor Type=Wirewound, Saturation Current=3.9A, Test Frequency=100kHz, Core Material=Ferrite, Height - Seated (Max)=0.177inch, Inductance=10uH, Lead Free="Lead Free", Length=0.236inch, Mount="Surface Mount", Packaging="Cut Tape", REACH SVHC="No SVHC", RMS Current (Irms)=3.4A, RoHS Compliant=Yes, Shielding=Shielded, Tolerance=20%, Width=0.236inch
Q1 Q3: library part CMP-12801-000012-1, "MOSFET N-CH 30V 1.4A SOT23-3", Continuous Drain Current=1.4A, Drain to Source Breakdown Voltage=30V, Drain to Source Resistance=0.22Ω, Gate To Source Voltage=20V, Input Capacitace At Vds="150pF @ 25V", Manufacturer="Diodes Inc.", Max Forward Diode Voltage=0.95V, Max Junction Temp=+150°C, Package=SOT23, Power Dissipation=625mW, Pulse Drain Current=7.3A, Temperature="-55°C to +150°C", Temperature Range Low=-55°C, Automotive=No, Category=Trans, ComponentLink2Description=Datasheet, ComponentLink2URL=https://www.diodes.com/assets/Datasheets/ZXM61N03F.pdf, Depletion Mode=False, Device Class L1="Discrete Semiconductors", Device Class L2=Transistors, Device Class L3=MOSFETs, Digikey Description="MOSFET N-CH 30V 1.4A SOT23-3", Drain To Source Voltage=30V, Footprint Url=https://www.diodes.com/assets/Package-Files/SOT23.pdf, Gate Charge At Vgs="4.1nC @ 10V", Height=1.1mm, Lead Free=Yes, Manufacturer Part Number=ZXM61N03FTA, Mouser Description="MOSFET 30V N-Chnl HDMOS", Number of Channels=1, Number Of N Channels=1, Octopart=https://octopart.com/zxm61n03fta-diodes+inc.-660007, Reverse Recovery Charge=3.5nC, Reverse Recovery Time=11ns, RoHS=TRUE, Rthja Max=200°C/W, Standoff Height=0.013mm, Temperature Range High=+150°C, Threshold Vgs Min=1V, Turn Off Delay Time=5.8ns, Turn On Delay Time=1.9ns
Q2: "Trans Mosfet P-ch 30V 4.3A 6-PIN SOT-26 T/r / Mosfet P-ch 30V 4.3A SOT-26", Case/Package=SOT-26-6, Continuous Drain Current (ID)=4.3A, Drain to Source Breakdown Voltage=-30V, Drain to Source Resistance=45mR, Drain to Source Voltage (Vdss)=30V, Gate to Source Voltage (Vgs)=10V, Input Capacitance=948pF, Manufacturer=Diodes, Manufacturer_Part_Number=DMG4407SSS-13, Max Operating Temperature=150°C, Max Power Dissipation=1.5W, Mfr_Name="Diodes Inc", Min Operating Temperature=-55°C, Package Quantity=3000, Category=MOSFETs, ComponentLink1Description=https://datasheet.ciiva.com/935/ds31449-935056.pdf?src-supplier=Digi-Key, ComponentLink1URL=https://datasheet.ciiva.com/935/ds31449-935056.pdf?src-supplier=Digi-Key, ComponentLink2Description=https://datasheet.ciiva.com/935/ds31449-935055.pdf?src-supplier=Digi-Key, ComponentLink2URL=https://datasheet.ciiva.com/935/ds31449-935055.pdf?src-supplier=Digi-Key, ComponentLink3Description=https://datasheet.ciiva.com/935/ds31449-935057.pdf?src-supplier=Digi-Key, ComponentLink3URL=https://datasheet.ciiva.com/935/ds31449-935057.pdf?src-supplier=Digi-Key, ComponentLink4Description=https://datasheet.ciiva.com/11176/ds31449-11176470.pdf?src-supplier=Avnet, ComponentLink4URL=https://datasheet.ciiva.com/11176/ds31449-11176470.pdf?src-supplier=Avnet, ComponentLink5Description=https://datasheet.ciiva.com/8115/ds31449-8115483.pdf?src-supplier=Avnet, ComponentLink5URL=https://datasheet.ciiva.com/8115/ds31449-8115483.pdf?src-supplier=Avnet, Copyright="Copyright (C) 2022 Ultra Librarian. All rights reserved.", Element Configuration=Single, Fall Time=22.3ns, Height=1.1mm, Lead Free="Lead Free", Length=3mm, Manufacturer Part Number=DMP3056LDM-7, Mount="Surface Mount", Number of Channels=1, Number of Elements=1, Number of Pins=6, Packaging="Cut Tape", Polarity=P-CHANNEL, Power Dissipation=1.5W, Pricing 1="1=0.31620, 10=0.31310, 25=0.30990, 100=0.23530, 250=0.23300, 500=0.20610, 1000=0.19360, 3000=0.17330 (USD)", Radiation Hardening=No, Rds On Max=45mR, REACH SVHC="No SVHC", RefDes=RefDes, Rise Time=6.6ns, RoHS=Yes, RoHS Compliant=Yes, Series=DMP3056, Stock 1=366, Supplier 1="Arrow Electronics", Supplier Part Number 1=DMP3056LDM-7, Turn-Off Delay Time=50.1ns, Turn-On Delay Time=10.2ns, Type=DEV, Weight=0.000529oz, Width=1.6mm
R1 R6 R10 R15: library part SFR01MZPJ000, "RES 0 OHM JUMPER 1/16W 0402", Device Package="0402 (1005 Metric)", Manufacturer="Rohm Semiconductor", Operating Temperature="-55°C ~ 155°C", Power (Watts)="0.063W, 1/16W", Resistance="0 Ohms", Supplier Device Package=0402, Supplier Part Number 1=511-1816-1-ND, Tolerance=Jumper, ComponentLink1Description=Datasheet, ComponentLink1URL=https://www.rohm.com/datasheet/SFR01MZPJ/sfr-e, ComponentLink2Description="DigiKey Link", ComponentLink2URL=https://www.digikey.com/en/products/detail/rohm-semiconductor/SFR01MZPJ000/9771849, Composition="Thick Film", Features=Anti-Sulfur, Height - Seated (Max)="0.016\" (0.40mm)", lastupdated="7/10/2022 9:15:04 AM", Lifecycle Status=Active, Minimum Order=1, Number of Terminations=2, Package / Case="0402 (1005 Metric)", Packaging=TapeAndReel, Part Number=SFR01MZPJ000, Part Status=Active, partid=3203, price=0.01, Series=SFR, Size / Dimension="0.039\" L x 0.020\" W (1.00mm x 0.50mm)", Supplier 1=DigiKey
R2: library part CRCW060347K0FKEAHP, "RES SMD 47K OHM 1% 1/3W 0603", Device Package="0603 (1608 Metric)", Manufacturer="Vishay Dale", Operating Temperature="-55°C ~ 155°C", Power (Watts)="0.333W, 1/3W", Ratings=AEC-Q200, Resistance="47 kOhms", Supplier Device Package=0603, Supplier Part Number 1=541-47.0KSCT-ND, Temperature Coefficient=±100ppm/°C, Tolerance=±1%, ComponentLink1Description=Datasheet, ComponentLink1URL=http://www.vishay.com/docs/20043/crcwhpe3.pdf, ComponentLink2Description="DigiKey Link", ComponentLink2URL=https://www.digikey.com/en/products/detail/vishay-dale/CRCW060347K0FKEAHP/2222271, Composition="Thick Film", Features="Automotive AEC-Q200, Pulse Withstanding", Height - Seated (Max)="0.022\" (0.55mm)", lastupdated="7/10/2022 9:22:30 AM", Lifecycle Status=Active, Minimum Order=1, Number of Terminations=2, Package / Case="0603 (1608 Metric)", Packaging=TapeAndReel, Part Number=CRCW060347K0FKEAHP, Part Status=Active, partid=7094, price=0.02, Series=CRCW-HP, Size / Dimension="0.063\" L x 0.033\" W (1.60mm x 0.85mm)", Supplier 1=DigiKey
R3: library part ERJ-2RKF9311X, "RES SMD 9.31K OHM 1% 1/10W 0402", Device Package="0402 (1005 Metric)", Manufacturer="Panasonic Electronic Components", Operating Temperature="-55°C ~ 155°C", Power (Watts)="0.1W, 1/10W", Ratings=AEC-Q200, Resistance="9.31 kOhms", Supplier Device Package=0402, Supplier Part Number 1=P9.31KLCT-ND, Temperature Coefficient=±100ppm/°C, Tolerance=±1%, ComponentLink1Description=Datasheet, ComponentLink1URL=https://industrial.panasonic.com/cdbs/www-data/pdf/RDA0000/AOA0000C304.pdf, ComponentLink2Description="DigiKey Link", ComponentLink2URL=https://www.digikey.com/en/products/detail/panasonic-electronic-components/ERJ-2RKF9311X/192505, Composition="Thick Film", Features="Automotive AEC-Q200", Height - Seated (Max)="0.016\" (0.40mm)", lastupdated="7/10/2022 9:15:02 AM", Lifecycle Status=Active, Minimum Order=1, Number of Terminations=2, Package / Case="0402 (1005 Metric)", Packaging=CutTape, Part Number=ERJ-2RKF9311X, Part Status=Active, partid=3866, price=0.01, Series=ERJ-2RK, Size / Dimension="0.039\" L x 0.020\" W (1.00mm x 0.50mm)", Supplier 1=DigiKey
R4 R8 R9 R12 R18: library part MCS0402MC1002FE000, "RES SMD 10K OHM 1% 1/10W 0402", Device Package="0402 (1005 Metric)", Manufacturer="Vishay Beyschlag", Operating Temperature="-55°C ~ 175°C", Power (Watts)="0.1W, 1/10W", Ratings=AEC-Q200, Resistance="10 kOhms", Supplier Device Package=0402, Supplier Part Number 1=MCS0402-10.0K-MFCT-ND, Temperature Coefficient=±50ppm/°C, Tolerance=±1%, ComponentLink1Description=Datasheet, ComponentLink1URL=http://www.vishay.com/docs/28760/mcat_pro.pdf, ComponentLink2Description="DigiKey Link", ComponentLink2URL=http://digikey.com/product-detail/en/vishay-beyschlag/MCS0402MC1002FE000/MCS0402-10.0K-MFCT-ND/3883092, Composition="Thin Film", Features="Anti-Sulfur, Automotive AEC-Q200", Height - Seated (Max)="0.015\" (0.37mm)", lastupdated="7/10/2022 9:15:04 AM", Lifecycle Status=Active, Minimum Order=1, Number of Terminations=2, Package / Case="0402 (1005 Metric)", Packaging=TapeAndReel, Part Number=MCS0402MC1002FE000, Part Status=Active, partid=3152, price=0.03, Series="MCS AT - Professional", Size / Dimension="0.039\" L x 0.020\" W (1.00mm x 0.50mm)", Supplier 1=DigiKey
R5: library part MCS04020C1003FE000, "RES SMD 100K OHM 1% 1/10W 0402", Device Package="0402 (1005 Metric)", Manufacturer="Vishay Beyschlag", Operating Temperature="-55°C ~ 155°C", Power (Watts)="0.1W, 1/10W", Resistance="100 kOhms", Supplier Device Package=0402, Supplier Part Number 1=MCS0402-100K-CFCT-ND, Temperature Coefficient=±50ppm/°C, Tolerance=±1%, ComponentLink1Description=Datasheet, ComponentLink1URL=http://www.vishay.com/docs/28705/mcx0x0xpro.pdf, ComponentLink2Description="DigiKey Link", ComponentLink2URL=http://digikey.com/product-detail/en/vishay-beyschlag/MCS04020C1003FE000/MCS0402-100K-CFCT-ND/2607930, Composition="Thin Film", Features=Anti-Sulfur, Height - Seated (Max)="0.015\" (0.37mm)", lastupdated="7/10/2022 9:15:04 AM", Lifecycle Status=Active, Minimum Order=1, Number of Terminations=2, Package / Case="0402 (1005 Metric)", Packaging=TapeAndReel, Part Number=MCS04020C1003FE000, Part Status=Active, partid=3149, price=0.03, Series="MCS - Professional", Size / Dimension="0.039\" L x 0.020\" W (1.00mm x 0.50mm)", Supplier 1=DigiKey
R7: library part RC0402FR-07120KL, "RES 120K OHM 1% 1/16W 0402", Device Package="0402 (1005 Metric)", Manufacturer=Yageo, Operating Temperature="-55°C ~ 155°C", Power (Watts)="0.063W, 1/16W", Resistance="120 kOhms", Supplier Device Package=0402, Supplier Part Number 1=311-120KLRCT-ND, Temperature Coefficient=±100ppm/°C, Tolerance=±1%, ComponentLink1Description=Datasheet, ComponentLink1URL=https://www.yageo.com/upload/media/product/productsearch/datasheet/rchip/PYu-RC_Group_51_RoHS_L_10.pdf, ComponentLink2Description="DigiKey Link", ComponentLink2URL=https://www.digikey.com/en/products/detail/yageo/RC0402FR-07120KL/726534, Composition="Thick Film", Features="Moisture Resistant", Height - Seated (Max)="0.016\" (0.40mm)", lastupdated="7/10/2022 9:15:05 AM", Lifecycle Status=Active, Minimum Order=1, Number of Terminations=2, Package / Case="0402 (1005 Metric)", Packaging=CutTape, Part Number=RC0402FR-07120KL, Part Status=Active, partid=2770, price=0.01, Series=RC_L, Size / Dimension="0.039\" L x 0.020\" W (1.00mm x 0.50mm)", Supplier 1=DigiKey
R11 R14 R16 R19: library part RCS0805100RFKEA, "RES SMD 100 OHM 1% 1/2W 0805", Device Package="0805 (2012 Metric)", Manufacturer="Vishay Dale", Operating Temperature="-55°C ~ 155°C", Power (Watts)="0.5W, 1/2W", Ratings=AEC-Q200, Resistance="100 Ohms", Supplier Device Package=0805, Supplier Part Number 1=541-2834-1-ND, Temperature Coefficient=±100ppm/°C, Tolerance=±1%, ComponentLink1Description=Datasheet, ComponentLink1URL=http://www.vishay.com/docs/20065/rcse3.pdf, ComponentLink2Description="DigiKey Link", ComponentLink2URL=https://www.digikey.com/en/products/detail/vishay-dale/RCS0805100RFKEA/5866980, Composition="Thick Film", Features="Automotive AEC-Q200, Pulse Withstanding", Height - Seated (Max)="0.020\" (0.50mm)", lastupdated="7/10/2022 9:36:40 AM", Lifecycle Status=Active, Minimum Order=1, Number of Terminations=2, Package / Case="0805 (2012 Metric)", Packaging=TapeAndReel, Part Number=RCS0805100RFKEA, Part Status=Active, partid=27784, price=0.03, Series="RCS e3", Size / Dimension="0.079\" L x 0.049\" W (2.00mm x 1.25mm)", Supplier 1=DigiKey
R13: library part RC0402FR-0788K7L, "RES 88.7K OHM 1% 1/16W 0402", Device Package="0402 (1005 Metric)", Manufacturer=Yageo, Operating Temperature="-55°C ~ 155°C", Power (Watts)="0.063W, 1/16W", Resistance="88.7 kOhms", Supplier Device Package=0402, Supplier Part Number 1=311-88.7KLRCT-ND, Temperature Coefficient=±100ppm/°C, Tolerance=±1%, ComponentLink1Description=Datasheet, ComponentLink1URL=https://www.yageo.com/upload/media/product/productsearch/datasheet/rchip/PYu-RC_Group_51_RoHS_L_10.pdf, ComponentLink2Description="DigiKey Link", ComponentLink2URL=https://www.digikey.com/en/products/detail/yageo/RC0402FR-0788K7L/726667, Composition="Thick Film", Features="Moisture Resistant", Height - Seated (Max)="0.016\" (0.40mm)", lastupdated="7/10/2022 9:15:05 AM", Lifecycle Status=Active, Minimum Order=1, Number of Terminations=2, Package / Case="0402 (1005 Metric)", Packaging=CutTape, Part Number=RC0402FR-0788K7L, Part Status=Active, partid=2803, price=0.01, Series=RC_L, Size / Dimension="0.039\" L x 0.020\" W (1.00mm x 0.50mm)", Supplier 1=DigiKey
R17: library part RC0402FR-0759KL, "RES 59K OHM 1% 1/16W 0402", Device Package="0402 (1005 Metric)", Manufacturer=Yageo, Operating Temperature="-55°C ~ 155°C", Power (Watts)="0.063W, 1/16W", Resistance="59 kOhms", Supplier Device Package=0402, Supplier Part Number 1=311-59KLRCT-ND, Temperature Coefficient=±100ppm/°C, Tolerance=±1%, ComponentLink1Description=Datasheet, ComponentLink1URL=https://www.yageo.com/upload/media/product/productsearch/datasheet/rchip/PYu-RC_Group_51_RoHS_L_10.pdf, ComponentLink2Description="DigiKey Link", ComponentLink2URL=https://www.digikey.com/en/products/detail/yageo/RC0402FR-0759KL/2827634, Composition="Thick Film", Features="Moisture Resistant", Height - Seated (Max)="0.016\" (0.40mm)", lastupdated="7/10/2022 9:15:06 AM", Lifecycle Status=Active, Minimum Order=1, Number of Terminations=2, Package / Case="0402 (1005 Metric)", Packaging=CutTape, Part Number=RC0402FR-0759KL, Part Status=Active, partid=2653, price=0.01, Series=RC_L, Size / Dimension="0.039\" L x 0.020\" W (1.00mm x 0.50mm)", Supplier 1=DigiKey
R20: library part RK73H1ETTP1001F, "RES 1K OHM 1% 1/10W 0402", Device Package="0402 (1005 Metric)", Manufacturer="KOA Speer Electronics, Inc.", Operating Temperature="-55°C ~ 155°C", Power (Watts)="0.1W, 1/10W", Ratings=AEC-Q200, Resistance="1 kOhms", Supplier Device Package=0402, Supplier Part Number 1=2019-RK73H1ETTP1001FCT-ND, Temperature Coefficient=±100ppm/°C, Tolerance=±1%, ComponentLink1Description=Datasheet, ComponentLink1URL=http://www.koaspeer.com/catimages/Products/RK73H/RK73H.pdf, ComponentLink2Description="DigiKey Link", ComponentLink2URL=https://www.digikey.com/en/products/detail/koa-speer-electronics-inc/RK73H1ETTP1001F/9844155, Composition="Thick Film", Features="Automotive AEC-Q200, Moisture Resistant", Height - Seated (Max)="0.016\" (0.40mm)", lastupdated="7/15/2022 11:42:29 AM", Lifecycle Status=Active, Minimum Order=1, Number of Terminations=2, Package / Case="0402 (1005 Metric)", Packaging=CutTape, Part Number=RK73H1ETTP1001F, Part Status=Active, partid=16007, price=0.01, Series=RK73H, Size / Dimension="0.039\" L x 0.020\" W (1.00mm x 0.50mm)", Supplier 1=DigiKey
R21: library part ERJ-PA2F5101X, "RES SMD 5.1 KOHM 1% 1/5W 0402", Device Package="0402 (1005 Metric)", Manufacturer="Panasonic Electronic Components", Operating Temperature="-55°C ~ 155°C", Power (Watts)="0.2W, 1/5W", Ratings=AEC-Q200, Resistance="5.1 kOhms", Supplier Device Package=402, Supplier Part Number 1=P124488CT-ND, Temperature Coefficient=±100ppm/°C, Tolerance=±1%, ComponentLink1Description=Datasheet, ComponentLink1URL=https://industrial.panasonic.com/cdbs/www-data/pdf/RDO0000/AOA0000C331.pdf, ComponentLink2Description="DigiKey Link", ComponentLink2URL=https://www.digikey.com/en/products/detail/panasonic-electronic-components/ERJ-PA2F5101X/9815254, Composition="Thick Film", Features="Automotive AEC-Q200, Pulse Withstanding", Height - Seated (Max)="0.016\" (0.40mm)", lastupdated="7/10/2022 9:14:48 AM", Lifecycle Status=Active, Minimum Order=1, Number of Terminations=2, Package / Case="0402 (1005 Metric)", Packaging=TapeAndReel, Part Number=ERJ-PA2F5101X, Part Status=Active, partid=8439, price=0.02, Series=ERJ-PA2, Size / Dimension="0.039\" L x 0.020\" W (1.00mm x 0.50mm)", Supplier 1=DigiKey
R22: library part ERJ-2RKF9530X, "RES SMD 953 OHM 1% 1/10W 0402", Device Package="0402 (1005 Metric)", Manufacturer="Panasonic Electronic Components", Operating Temperature="-55°C ~ 155°C", Power (Watts)="0.1W, 1/10W", Ratings=AEC-Q200, Resistance="953 Ohms", Supplier Device Package=0402, Supplier Part Number 1=P953LCT-ND, Temperature Coefficient=±100ppm/°C, Tolerance=±1%, ComponentLink1Description=Datasheet, ComponentLink1URL=https://industrial.panasonic.com/cdbs/www-data/pdf/RDA0000/AOA0000C304.pdf, ComponentLink2Description="DigiKey Link", ComponentLink2URL=https://www.digikey.com/en/products/detail/panasonic-electronic-components/ERJ-2RKF9530X/192518, Composition="Thick Film", Features="Automotive AEC-Q200", Height - Seated (Max)="0.016\" (0.40mm)", lastupdated="7/10/2022 9:15:03 AM", Lifecycle Status=Active, Minimum Order=1, Number of Terminations=2, Package / Case="0402 (1005 Metric)", Packaging=CutTape, Part Number=ERJ-2RKF9530X, Part Status=Active, partid=3748, price=0.01, Series=ERJ-2RK, Size / Dimension="0.039\" L x 0.020\" W (1.00mm x 0.50mm)", Supplier 1=DigiKey
S1: library part UL
S2: library part RoHS
S3: library part 34EngineeringLogo, "34 Engineering Silkscreen Logo"
TP1 TP2: library part TestPoint1mm, "Test Point 1mm Diameter"
U1: "5.1V Voltage Clmp Latch Type", Manufacturer=Toshiba, Manufacturer Part Number=TCKE812NLRF, Supplier Part Number 1=655L16112I2T-ND, RoHS=Yes, Supplier 1=Digi-Key
U2: "DC to DC Converter Quad Step-Down 3V to 5.5V Automotive 28-Pin TQFN Tube", Manufacturer=Maxim, Mfr_Name="Maxim Integrated Products", Supplier Part Number 1=700-MAX20029ATIF/V+, Copyright="Copyright (C) 2022 Ultra Librarian. All rights reserved.", Manufacturer Part Number=MAX20029ATIF/V+, Manufacturer_Part_Number=MAX20029ATIF/V+, Pricing 1="1=3.71000, 10=3.34000, 25=3.15000, 50=3.15000, 100=3.15000, 120=2.72000, 300=2.64000, 540=2.41000, 1000=2.41000, 1020=2.29000, 2520=2.25000, 10000=2.25000 (USD)", RefDes=RefDes, RoHS=Yes, Stock 1=121, Supplier 1=Mouser, Type=DEV
U3: library part CMP-0069-01694-3, "550kHz/1.6MHz 1.5A Step-Down DC-DC Switching Regulator, 8-pin eMSOP, Pb-Free", Manufacturer="Texas Instruments", PackageTopMarking=ZXTT*STDB, PowerWise=N, Code_JEDEC=MO-187-AA, ComponentLink1Description="Datasheet URL", ComponentLink1URL=http://www.ti.com/general/docs/lit/getliterature.tsp?genericPartNumber=LM2738&fileType=pdf, CompType=Switcher, PackageDescription="Molded Mini-SO, Exposed Pad, .118 x .118 x .034in Body, 8 Lead, .0256in Pitch", PackageReference=DGN0008A, PinCount=8, RoHS=Y

## Free pads (board coordinates)
  round 4.4 hole 2.2: 1(-10.25,-10.25) 1(10.25,10.25)
  round 2.2 hole 2.2 unplated: 1(-10.25,10.25) 1(10.25,-10.25)

## Via types
v1: diameter 0.4, hole 0.2, 1 Top (Sig/Pwr) to 6 Bottom (Sig/Pwr), tented both sides, 4 vias

## Nets (pads, with @x,y where several pads share a name; then routed paths per layer and width w, separated by ;. In a path a pad name is that pad's centre, name@x,y a point inside that pad or via, vN(x,y) a via of type N, cw(c..) or ccw(c..) an arc to the next point about the centre after c; other vN are vias at no path point)
1.8V_EN: R6.1 U2.9
1.8V_LX: L2.1 U2.6
1.8V_PG: J3.25 R9.1 R10.2 U2.10
1V_EN: R1.1 U2.1
1V_LX: L1.1 U2.3
1V_PG: R4.1 R6.2 U2.27
2.5V_EN: R10.1 U2.13
2.5V_LX: L3.1 U2.16
2.5V_OUTS: C12.1 R13.1 R17.2 U2.14
2.5V_PG: R12.1 R15.2 U2.12
3.3V_EN: R15.1 U2.21
3.3V_LX: L4.1 U2.19
3.3V_PG: R18.1 TP1.1 U2.23
5V_BST: C16.1 D11.1 U3.1
5V_FB: R21.1 R22.2 U3.6
5V_SW: C16.2 D12.1 L5.1 U3.8
12V_REV_SW: Q1.1 Q3.1 U1.9
12V_RPP_SW: Q2.3 R2.1
12V_UVLO: R3.1 R5.2 U1.2
+1: C3.2 C5.2 C6.2 J3.50 L1.2 U2.28
+1.8: C9.2 J3.45 J3.46 J3.47 L2.2 U2.8
+2.5: C11.2 C12.2 J3.41 L3.2 R13.2
+3.3: C14.2 J3.37 J3.38 L4.2 R8.1 TP2.1 U2.22
+5: C2.2 C8.2 C10.2 C13.2 C15.2 C20.2 C21.2 C22.2 D10.1 D11.2 J3.33 J3.34 L5.2 R1.2 R4.2 R9.2 R12.2 R18.2 R21.2 U2.2 U2.7 U2.15 U2.20 U2.26
+12_CAB: C1.2 C17.2 C18.2 C19.2 J3.28 J3.29 J3.30 Q1.2 U3.2 U3.3 U3.4
+12_CAB_UNP1: Q1.3 U1.6 U1.7 U1.8
+12_CAB_UNP2: C4.2 Q2.4 R3.2 U1.3 U1.4 U1.5
+12_CAB_UNP3: D1.2 J2.5 Q2.1 Q2.2 Q2.5 Q2.6
ENC: 
GND: C1.1 C2.1 C3.1 C4.1 C5.1 C6.1 C7.1 C8.1 C9.1 C10.1 C11.1 C13.1 C14.1 C15.1 C17.1 C18.1 C19.1 C20.1 C21.1 C22.1 D1.1 D2.1 D3.1 D4.1 D5.1 D6.1 D7.1 D8.1 D9.1 D12.2 J2.6 J3.1 J3.2 J3.3 J3.4 J3.5 J3.6 J3.7 J3.8 J3.9 J3.10 J3.11 J3.12 J3.13 J3.14 J3.15 J3.16 J3.17 J3.19 J3.22 J3.26 J3.27 J3.31 J3.32 J3.35 J3.36 J3.39 J3.40 J3.42 J3.43 J3.44 J3.48 J3.49 J3.MNT Q3.2 R2.2 R5.1 R7.2 R17.1 R20.2 R22.1 U1.11 U2.4 U2.5 U2.11 U2.17 U2.18 U2.24 U2.25 U2.29 U3.5 U3.7 U3.9
  other v1: 90.153,1.532 91.153,1.532 90.153,2.532 91.153,2.532
NetC7_2: C7.2 U1.1
NetD10_2: D10.2 R20.1
NetR7_1: R7.1 U1.10
PWR_12V_OFF: J3.18 Q3.3 R8.2
RIO_CS: D6.2 J3.24 R19.2
RIO_CS_UNP: D2.2 J2.1 R19.1
RIO_MISO: D7.2 J3.23 R16.2
RIO_MISO_UNP: D3.2 J2.2 R16.1
RIO_MOSI: D8.2 J3.21 R14.2
RIO_MOSI_UNP: D4.2 J2.3 R14.1
RIO_SCLK: D9.2 J3.20 R11.2
RIO_SCLK_UNP: D5.2 J2.4 R11.1
pads on no net: J1.MNT

## Polygon pours and split planes (outlines as drawn)
GND on 2 (GND) (split plane): 11.858,12.224 11.961,12.188 12.053,12.13 12.13,12.053 12.188,11.961 12.224,11.858 12.24,11.721 12.24,-11.721 12.224,-11.858 12.188,-11.961 12.13,-12.053 12.053,-12.13 11.961,-12.188 11.858,-12.224 11.721,-12.24 -11.721,-12.24 -11.858,-12.224 -11.961,-12.188 -12.053,-12.13 -12.13,-12.053 -12.188,-11.961 -12.224,-11.858 -12.24,-11.721 -12.24,11.721 -12.224,11.858 -12.188,11.961 -12.13,12.053 -12.053,12.13 -11.961,12.188 -11.858,12.224 -11.721,12.24 11.721,12.24